# Altium PCB Sinewave_PWM_controller_3_PHASE.PcbDoc
Units mm, origin at the board's own origin, x right, y up, seen from the top; angles counter-clockwise.
Board outline 420 x 300 mm, 2 copper layers (Top Layer, Bottom Layer), stack 2.071 mm thick; 169 components, 93 nets, 494 pads, 0 vias.
Unrouted connection lines stored in the file: 347.
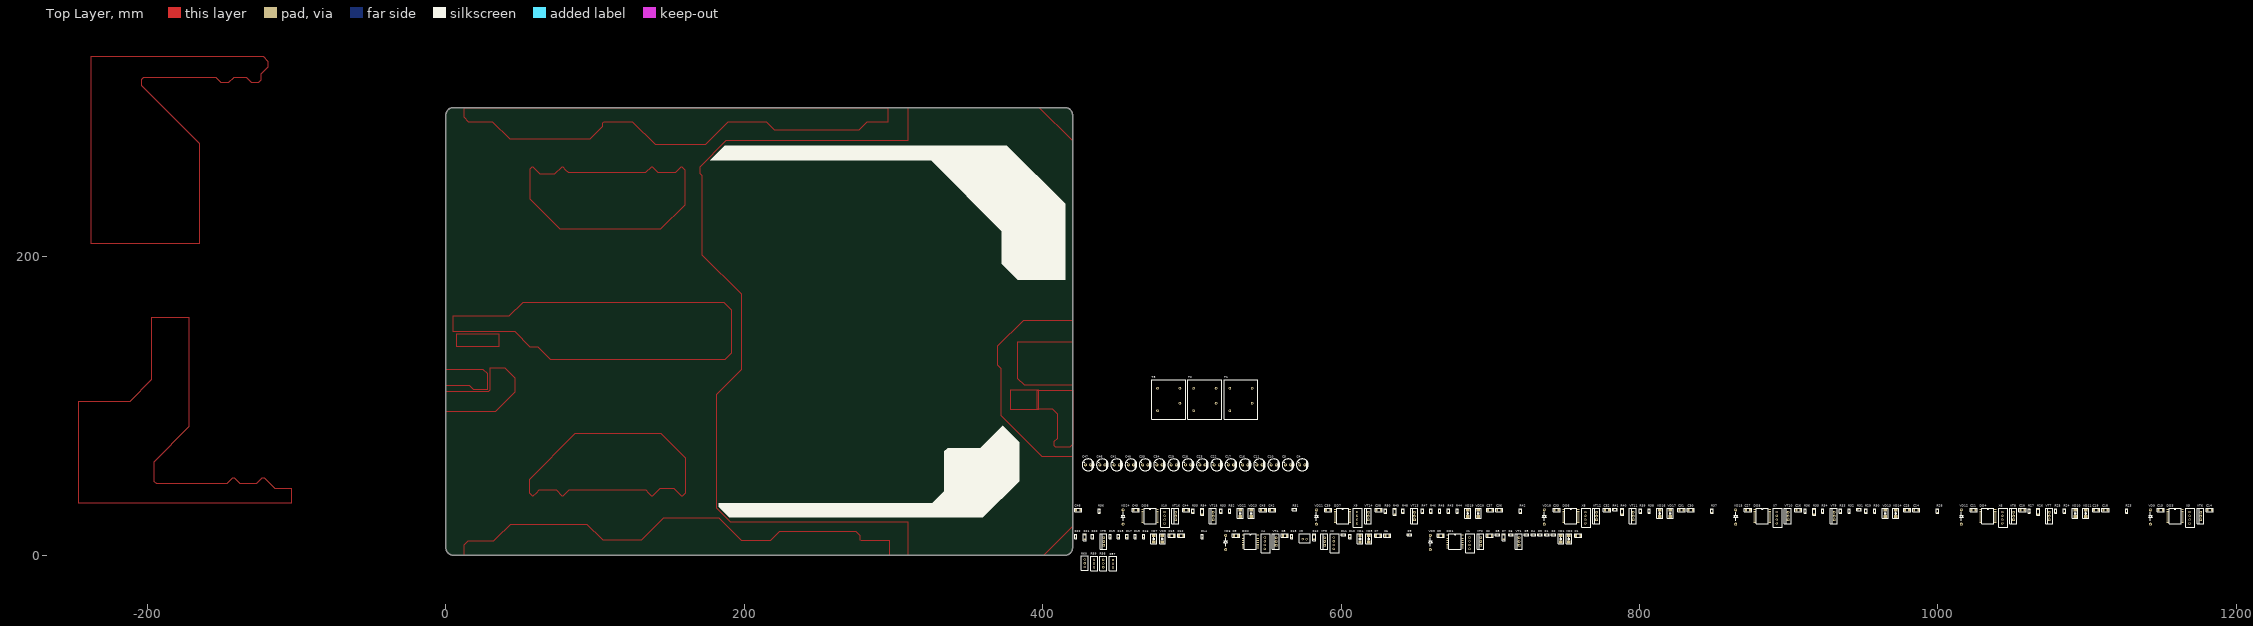
[diagram p0: Top Layer view]
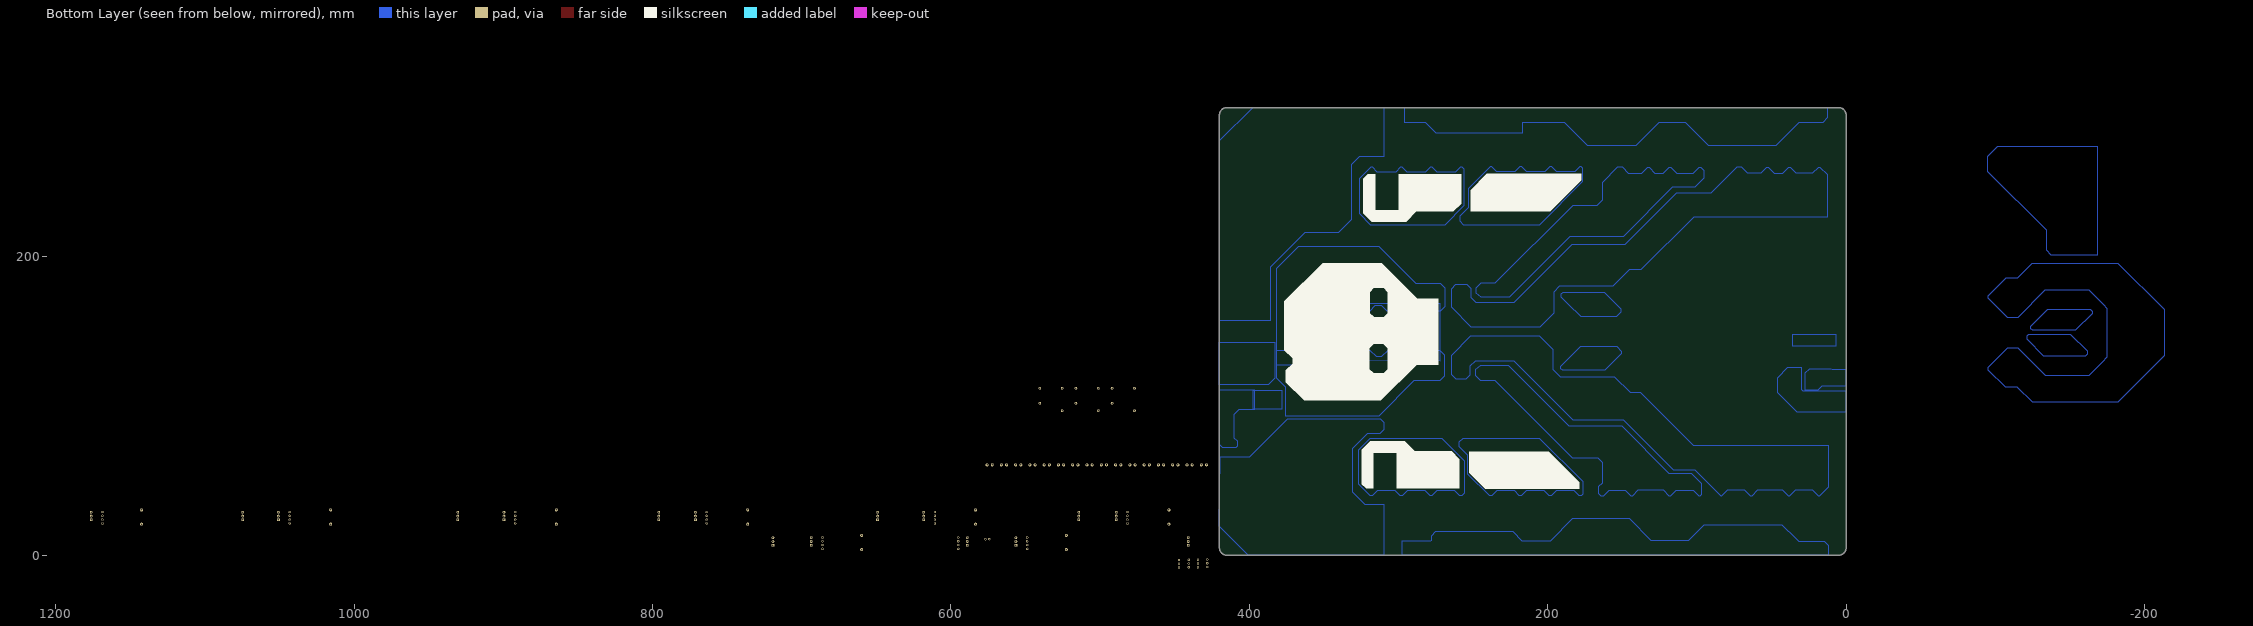
[diagram p1: Bottom Layer view, seen from below]

## Layer stack, top to bottom
Top Solder: solder mask 0.0102, Solder Resist, Dk 3.5
Top Layer: signal copper 0.0356
Dielectric 1: dielectric 2, FR-4, Dk 4.8
Bottom Layer: signal copper 0.0356
Bottom Solder: solder mask 0.0102, Solder Resist, Dk 3.5

## Board outline
5,0 cw(c5,5) 0,5 0,295 cw(c5,295) 5,300 5.077,300 415,300.003 415,300 cw(c415,295) 420,295 420,5 cw(c415,5) 415,0

## Design rules (kind name [scope] priority, off if disabled: settings)
Clearance [All] p1: gap=0.8 ignorepadtopadclearanceinfootprint=TRUE except(0: Via-Hole Fill-Hole Text-Hole; 0.2: Arc-Track Arc-SMDPad Arc-THPad Arc-Via Arc-Fill Arc-Poly Arc-Region Arc-Text Arc-Hole; 0.25: Track-Track Track-SMDPad Track-THPad Track-Via Track-Fill Track-Poly Track-Region Track-Text Track-Hole; 0.254: Via-Via Via-Fill Via-Poly Via-Region Via-Text Fill-Fill Fill-Poly Fill-Region Fill-Text Text-Text; 0.4: Arc-Arc SMDPad-SMDPad SMDPad-THPad SMDPad-Via SMDPad-Fill SMDPad-Poly SMDPad-Region SMDPad-Text SMDPad-Hole)
ComponentClearance [All] p1: gap=-5 collisioncheckmode=3 verticalgap=0.254 showdistances=FALSE
DiffPairsRouting [All] p1: maxlimit=5 minlimit=0.254 mostfreqgap=0.254 toplayer_minwidth=0.381 toplayer_maxwidth=0.381 toplayer_prefwidth=0.381 bottomlayer_minwidth=0.381 bottomlayer_maxwidth=0.381 bottomlayer_prefwidth=0.381 maxuncoupledlength=12.7
Height [All] p1: minheight=0 maxheight=150 prefheight=50
MinimumSolderMaskSliver [All] p1: minsoldermaskwidth=0.15
PlaneClearance [All] p1: clearance=0.7
PlaneConnect [All] p1: planeconnectstyle=Direct reliefexpansion=0.508 reliefentries=4 reliefconductorwidth=0.254 reliefairgap=0.5
PolygonConnect [All] p1: connectstyle=Relief reliefconductorwidth=0.2 reliefentries=4 polygonreliefangle="90 Angle" airgapwidth=0.2
RoutingVias [All] p1: holewidth=0.711 width=1.27 viastyle="Through Hole" minholewidth=0.711 minwidth=1.27 maxholewidth=0.711 maxwidth=1.27
SilkToSilkClearance [All] p1: silktosilkclearance=0.15
SilkToSolderMaskClearance [IsPad] p1: minsilkscreentomaskgap=0.15 clearancetoexposedcopper=TRUE
SolderMaskExpansion [All] p1: expansion=0.102 istentingtop=FALSE
Width [All] p1: maxlimit=7 minlimit=0.254 preferedwidth=2 minimp=50.000000 maximp=50.000000 favimp=50.000000
22 further rules are at their usual default settings.

## Components (designator, comment, footprint, x,y, rotation, side; value= is the part's Value field where it differs from the comment)
C1 "100nF" CAP-1206 758.966,13.213 r0 top
C2 "10nF" CAP-1206 699.538,13.213 r0 top
C3 "100nF" CAP-1206 666.787,13.213 r0 top
C4 "CAP-POLAR" CAPPOL8x12 574.032,60.538 r0 top
C5 "CAP-POLAR" CAPPOL8x12 564.456,60.538 r0 top
C6 "100nF" CAP-1206 631.06,13.213 r0 top
C7 "100nF" CAP-1206 624.835,13.213 r0 top
C8 "10nF" CAP-1206 562.357,13.213 r0 top
C9 "100nF" CAP-1206 529.58,13.213 r0 top
C10 "CAP-POLAR" CAPPOL8x12 554.881,60.538 r0 top
C11 "CAP-POLAR" CAPPOL8x12 545.305,60.538 r0 top
C12 "100nF" CAP-1206 492.778,13.213 r0 top
C13 "100nF" CAP-1206 486.553,13.213 r0 top
C14 "10nF" CAP-1206 1182.162,30.264 r0 top
C15 "100nF" CAP-1206 1149.385,30.264 r0 top
C16 "CAP-POLAR" CAPPOL8x12 535.73,60.538 r0 top
C17 "CAP-POLAR" CAPPOL8x12 526.155,60.538 r0 top
C18 "100nF" CAP-1206 1112.333,30.264 r0 top
C19 "100nF" CAP-1206 1106.108,30.264 r0 top
C20 "10nF" CAP-1206 1056.681,30.264 r0 top
C21 "100nF" CAP-1206 1023.904,30.264 r0 top
C22 "CAP-POLAR" CAPPOL8x12 516.604,60.538 r0 top
C23 "CAP-POLAR" CAPPOL8x12 507.029,60.538 r0 top
C24 "100nF" CAP-1206 985.577,30.264 r0 top
C25 "100nF" CAP-1206 979.352,30.264 r0 top
C26 "10nF" CAP-1206 906.523,30.264 r0 top
C27 "100nF" CAP-1206 872.722,30.264 r0 top
C28 "CAP-POLAR" CAPPOL8x12 497.453,60.538 r0 top
C29 "CAP-POLAR" CAPPOL8x12 487.878,60.538 r0 top
C30 "100nF" CAP-1206 834.395,30.264 r0 top
C31 "100nF" CAP-1206 828.17,30.264 r0 top
C32 "10nF" CAP-1206 778.217,30.264 r0 top
C33 "100nF" CAP-1206 744.415,30.264 r0 top
C34 "CAP-POLAR" CAPPOL8x12 478.302,60.538 r0 top
C35 "CAP-POLAR" CAPPOL8x12 468.727,60.538 r0 top
C36 "100nF" CAP-1206 706.064,30.264 r0 top
C37 "100nF" CAP-1206 699.863,30.264 r0 top
C38 "10nF" CAP-1206 625.235,30.264 r0 top
C39 "100nF" CAP-1206 591.408,30.264 r0 top
C40 "CAP-POLAR" CAPPOL8x12 459.151,60.538 r0 top
C41 "CAP-POLAR" CAPPOL8x12 449.576,60.538 r0 top
C42 "100nF" CAP-1206 553.856,30.264 r0 top
C43 "100nF" CAP-1206 547.631,30.264 r0 top
C44 "10nF" CAP-1206 496.153,30.264 r0 top
C45 "100nF" CAP-1206 462.352,30.264 r0 top
C46 "CAP-POLAR" CAPPOL8x12 440,60.538 r0 top
C47 "CAP-POLAR" CAPPOL8x12 430.425,60.538 r0 top
C48 "100nF" CAP-1206 423.75,30.264 r0 top
DD1 "HCPL-316J" SO16_W 676.362,9.838 r0 top
DD2 "HCPL-316J" SO16_W 539.18,9.838 r0 top
DD3 "HCPL-316J" SO16_W 1158.986,26.889 r0 top
DD4 "HCPL-316J" SO16_W 1033.505,26.889 r0 top
DD5 "HCPL-316J" SO16_W 882.322,26.889 r0 top
DD6 "HCPL-316J" SO16_W 754.016,26.889 r0 top
DD7 "HCPL-316J" SO16_W 601.008,26.889 r0 top
DD8 "HCPL-316J" SO16_W 471.952,26.889 r0 top
R1 "220" RES-0805 737.915,13.663 r0 top
R2 "100" RES-0805 742.415,13.663 r0 top
R3 "1K" RES-0805 733.39,13.663 r0 top
R4 "5K1" RES-0805 728.865,13.663 r0 top
R5 "220" RES-0805 724.339,13.663 r0 top
R6 "1K" RES-0805 713.764,13.663 r0 top
R7 "10" RES-1206 708.914,12.138 r90 top
R8 "10K" RES-0805 704.914,13.663 r0 top
R9 "1K" RES-0805 645.986,13.663 r0 top
R10 "100" RES-0805 605.934,12.688 r90 top
R11 "5K1" RES-0805 601.583,13.663 r0 top
R12 "10" RES-1206 581.908,12.138 r90 top
R13 "10K" RES-0805 566.957,12.688 r90 top
R14 "1K" RES-0805 506.954,12.688 r90 top
R15 "220" RES-0805 462.052,12.688 r90 top
R16 "100" RES-0805 467.652,12.688 r90 top
R17 "1K" RES-0805 456.451,12.688 r90 top
R18 "5K1" RES-0805 450.851,12.688 r90 top
R19 "220" RES-0805 445.276,12.688 r90 top
R20 "1K" RES-0805 433.35,12.538 r90 top
R21 "10" RES-1206 428.25,12.138 r90 top
R22 "10K" RES-0805 422.15,12.538 r90 top
R23 "1K" RES-0805 1126.509,29.589 r90 top
R24 "100" RES-0805 1084.907,29.589 r90 top
R25 "5K1" RES-0805 1079.057,29.589 r90 top
R26 "10" RES-1206 1067.381,29.189 r90 top
R27 "10K" RES-0805 1061.281,29.589 r90 top
R28 "1K" RES-0805 999.753,29.589 r90 top
R29 "220" RES-0805 951.801,29.589 r90 top
R30 "100" RES-0805 957.651,29.589 r90 top
R31 "1K" RES-0805 947.225,30.714 r0 top
R32 "5K1" RES-0805 940.6,29.589 r90 top
R33 "220" RES-0805 934.75,29.589 r90 top
R34 "1K" RES-0805 922.824,29.589 r90 top
R35 "10" RES-1206 917.249,29.189 r90 top
R36 "10K" RES-0805 911.124,29.589 r90 top
R37 "1K" RES-0805 848.571,29.589 r90 top
R38 "100" RES-0805 806.468,29.589 r90 top
R39 "5K1" RES-0805 800.618,29.589 r90 top
R40 "10" RES-1206 788.418,29.189 r90 top
R41 "10K" RES-0805 783.592,30.714 r0 top
R42 "1K" RES-0805 720.264,29.589 r90 top
R43 "220" RES-0805 672.062,29.589 r90 top
R44 "100" RES-0805 677.912,29.589 r90 top
R45 "1K" RES-0805 666.187,29.589 r90 top
R46 "5K1" RES-0805 660.336,29.589 r90 top
R47 "220" RES-0805 654.486,29.589 r90 top
R48 "1K" RES-0805 641.535,29.589 r90 top
R49 "10" RES-1206 635.935,29.189 r90 top
R50 "10K" RES-0805 629.835,29.589 r90 top
R51 "1K" RES-0805 568.782,30.714 r0 top
R52 "100" RES-0805 525.43,29.589 r90 top
R53 "5K1" RES-0805 519.579,29.589 r90 top
R54 "10" RES-1206 506.854,29.189 r90 top
R55 "10K" RES-0805 500.754,29.589 r90 top
R56 "1K" RES-0805 437.95,29.589 r90 top
R57 "3296" 3296W 445.1,-5.4 r0 top
R58 "3296" 3296W 438.55,-5.3 r0 top
R59 "3296" 3296W 432.45,-5.3 r0 top
R60 "3296" 3296W 426.15,-5.1 r0 top
T1 "TRANS_220_12" TRANS_220_12 532.928,104.363 r0 top
T2 "TRANS_220_12" TRANS_220_12 508.701,104.363 r0 top
T3 "TRANS_220_12" TRANS_220_12 484.475,104.363 r0 top
VD1 "US1M" DO-214BA 747.341,11.088 r90 top
VD2 "US1M" DO-214BA 752.691,11.088 r90 top
VD3 "1N4737" DO-41 659.811,8.263 r90 top
VD4 "US1M" DO-214BA 612.684,11.088 r90 top
VD5 "US1M" DO-214BA 618.534,11.088 r90 top
VD6 "1N4737" DO-41 522.63,8.263 r90 top
VD7 "US1M" DO-214BA 474.427,11.088 r90 top
VD8 "US1M" DO-214BA 480.253,11.088 r90 top
VD9 "1N4737" DO-41 1142.435,25.314 r90 top
VD10 "US1M" DO-214BA 1091.932,28.114 r90 top
VD11 "US1M" DO-214BA 1099.033,28.114 r90 top
VD12 "1N4737" DO-41 1015.679,25.314 r90 top
VD13 "US1M" DO-214BA 964.676,28.114 r90 top
VD14 "US1M" DO-214BA 971.802,28.114 r90 top
VD15 "1N4737" DO-41 864.496,25.314 r90 top
VD16 "US1M" DO-214BA 813.494,28.114 r90 top
VD17 "US1M" DO-214BA 820.594,28.114 r90 top
VD18 "1N4737" DO-41 736.165,25.314 r90 top
VD19 "US1M" DO-214BA 684.913,28.114 r90 top
VD20 "US1M" DO-214BA 692.038,28.114 r90 top
VD21 "1N4737" DO-41 583.433,25.314 r90 top
VD22 "US1M" DO-214BA 532.43,28.114 r90 top
VD23 "US1M" DO-214BA 539.805,28.114 r90 top
VD24 "1N4737" DO-41 453.851,25.314 r90 top
VT1 "D44H11G" TO-220-3 719.264,9.213 r90 top
VT2 "D45H11G" TO-220-3 693.588,9.213 r90 top
VT3 "D44H11G" TO-220-3 589.008,9.213 r90 top
VT4 "D45H11G" TO-220-3 556.406,9.213 r90 top
VT5 "D44H11G" TO-220-3 440.926,9.213 r90 top
VT6 "D45H11G" TO-220-3 1176.212,26.264 r90 top
VT7 "D44H11G" TO-220-3 1074.732,26.264 r90 top
VT8 "D45H11G" TO-220-3 1050.73,26.264 r90 top
VT9 "D44H11G" TO-220-3 930.425,26.264 r90 top
VT10 "D45H11G" TO-220-3 899.548,26.264 r90 top
VT11 "D44H11G" TO-220-3 795.768,26.264 r90 top
VT12 "D45H11G" TO-220-3 771.217,26.264 r90 top
VT13 "D44H11G" TO-220-3 649.136,26.264 r90 top
VT14 "D45H11G" TO-220-3 618.234,26.264 r90 top
VT15 "D44H11G" TO-220-3 514.204,26.264 r90 top
VT16 "D45H11G" TO-220-3 489.153,26.264 r90 top
X1 "CONN-4-PIN" CONN-PLS-4-2.54mm_1 686.063,4.263 r90 top
X2 "CONN-4-PIN" CONN-PLS-4-2.54mm_1 595.058,4.263 r90 top
X3 "CONN-2-PIN" XH2- 574.307,10.763 r0 top
X4 "CONN-4-PIN" CONN-PLS-4-2.54mm_1 548.881,4.263 r90 top
X5 "CONN-4-PIN" CONN-PLS-4-2.54mm_1 1168.686,21.314 r90 top
X6 "CONN-4-PIN" CONN-PLS-4-2.54mm_1 1043.205,21.314 r90 top
X7 "CONN-4-PIN" CONN-PLS-4-2.54mm_1 892.023,21.314 r90 top
X8 "CONN-4-PIN" CONN-PLS-4-2.54mm_1 763.716,21.314 r90 top
X9 "CONN-4-PIN" CONN-PLS-4-2.54mm_1 610.709,21.314 r90 top
X10 "CONN-4-PIN" CONN-PLS-4-2.54mm_1 481.653,21.314 r90 top

## Footprints (in the part's own frame and the unit in brackets; to place one, negate y for a bottom-side part, rotate by r counter-clockwise, add the part's x,y. Pads: shape width x height; smd on the part's side, far side on the other; paste and mask are expansions set on the pad)
3296W [mm]
  round 1.5 hole 0.8: 1(2,-2.8) 2(2,-0.3) 3(2,2.2)
  silkscreen extent -0.4,-5.1 4.5,4.6, body extent -0.43,-5.02 4.4,4.52, height 11.55
CAP-1206 [mm]
  rect 1.3x1.8 smd: 1(-1.425,0) 2(1.425,0)
  silkscreen extent -2.37,-1.2 2.37,1.2, body extent -1.68,-0.87 1.67,0.87, height 0.95
CAPPOL8x12 [mm]
  round 2 hole 1: 1(-1.75,0) 2(1.75,0)
  silkscreen extent -4,-4 4,4, body extent -4,-4 4.01,4, height 13.51
CONN-PLS-4-2.54mm_1 [mm]
  round 1.5 hole 0.9: 1(0,0) 2(2.54,0) 3(5.08,0) 4(7.62,0)
  silkscreen extent -2.6,-3.55 10.15,2.47, body extent -2.45,-3.4 9.95,2.35, height 7
DO-41 [mm]
  round 2 hole 1: 1(5,0) 2(-4.5,0)
  silkscreen extent -2.2,-1.3 3.6,1.2, body extent -4.93,-1.36 5.45,1.34, height 2.83
DO-214BA [mm]
  rect 2x2.3 smd: 1(-2.15,0) 2(2.15,0)
  silkscreen extent -3.35,-1.92 3.35,1.92, body extent -2.7,-1.81 2.7,1.81, height 3.3
RES-0805 [mm]
  rect 0.8x1.25 smd mask+0.015: 1(-1,0) 2(1,0)
  silkscreen extent -1.52,-0.76 1.52,0.76, body extent -1,-0.62 1,0.63, height 0.6
RES-1206 [mm]
  rect 1x1.6 smd: 1(-1.6,0) 2(1.6,0)
  silkscreen extent -2.29,-1.02 2.29,1.02, body extent -1.6,-0.8 1.6,0.8, height 0.6
SO16_W [mm]
  rect 1.5x0.6 smd: 1(-5,3.81) 2(-5,2.54) 3(-5,1.27) 4(-5,0) 5(-5,-1.27) 6(-5,-2.54) 7(-5,-3.81) 8(-5,-5.08) 9(5,-5.08) 10(5,-3.81) 11(5,-2.54) 12(5,-1.27) 13(5,0) 14(5,1.27) 15(5,2.54) 16(5,3.81)
  silkscreen extent -4.05,-5.85 4.05,4.57, body extent -5.16,-5.8 5.16,4.53, height 2.48
TO-220-3 [mm]
  rect 1.8x1.8 hole 1: 1(-2.54,0)
  round 1.8 hole 1: 2(0,0) 3(2.54,0)
  silkscreen extent -5.2,-2.1 5.2,2.5, body extent -4.95,-2.1 4.95,2.4, height 23.8
TRANS_220_12 [mm]
  round 1.8 hole 1: 1(-7.5,7.5) 2(-7.5,-7.5) 3(7.5,-2.5) 4(7.5,7.5)
  silkscreen extent -11.4,-13.3 11.3,13.3, body extent -11.26,-13.25 11.25,13.25, height 23.7
XH2- [mm]
  round 1.5 hole 0.9: 1(0,0) 2(2.54,0)
  silkscreen extent -2.5,-2.35 5.13,3.65, body extent -2.4,-2.25 5,3.55, height 7

## Part data
C1 C2 C3 C6 C7 C8 C9 C12 C13 C14 C15 C18 C19 C20 C21 C24 C25 C26 C27 C30 C31 C32 C33 C36 C37 C38 C39 C42 C43 C44 C45 C48: library part CAP-NON-POLAR
R1 R2 R3 R4 R5 R6 R7 R8 R9 R10 R11 R12 R13 R14 R15 R16 R17 R18 R19 R20 R21 R22 R23 R24 R25 R26 R27 R28 R29 R30 R31 R32 R33 R34 R35 R36 R37 R38 R39 R40 R41 R42 R43 R44 R45 R46 R47 R48 R49 R50 R51 R52 R53 R54 R55 R56: library part RES-CONST
VD1 VD2 VD4 VD5 VD7 VD8 VD10 VD11 VD13 VD14 VD16 VD17 VD19 VD20 VD22 VD23: library part DIODE
VD3 VD6 VD9 VD12 VD15 VD18 VD21 VD24: library part ZENER
VT1 VT3 VT5 VT7 VT9 VT11 VT13 VT15: library part BIPOLAR-NPN-BEC
VT2 VT4 VT6 VT8 VT10 VT12 VT14 VT16: library part BIPOLAR-PNP-BCE

## Nets (pads, with @x,y where several pads share a name; then routed paths per layer and width w, separated by ;. In a path a pad name is that pad's centre, name@x,y a point inside that pad or via, vN(x,y) a via of type N, cw(c..) or ccw(c..) an arc to the next point about the centre after c; other vN are vias at no path point)
24V1: C9.2 C10.1 C21.2 C22.1 C33.2 C34.1 C45.2 C46.1 DD2.12 DD2.13 DD4.12 DD4.13 DD6.12 DD6.13 DD8.12 DD8.13 R11.1 R25.1 R39.1 R53.1 VD6.1 VD12.1 VD18.1 VD24.1 VT3.2 VT7.2 VT11.2 VT15.2
24V2: C3.2 C4.1 DD1.12 DD1.13 R4.1 VD3.1 VT1.2
24V3: C15.2 C16.1 DD3.12 DD3.13 R18.1 VD9.1 VT5.2
24V4: C27.2 C28.1 DD5.12 DD5.13 R32.1 VD15.1 VT9.2
24V5: C39.2 C40.1 DD7.12 DD7.13 R46.1 VD21.1 VT13.2
+5V: DD1.3 DD1.5 DD2.3 DD2.5 DD3.3 DD3.5 DD4.3 DD4.5 DD5.3 DD5.5 DD6.3 DD6.5 DD7.3 DD7.5 DD8.3 DD8.5
A1: R1.2
A2: R5.2
B1: R15.2
B2: R19.2
C1: R29.2
C2: R33.2
FAULT: DD1.6 DD2.6 DD3.6 DD4.6 DD5.6 DD6.6 DD7.6 DD8.6
G1: R43.2
G2: R47.2
GND: DD1.4 DD1.8 DD2.4 DD2.8 DD3.4 DD3.8 DD4.4 DD4.8 DD5.4 DD5.8 DD6.4 DD6.8 DD7.4 DD7.8 DD8.4 DD8.8 R3.2 R6.2 R17.2 R20.2 R31.2 R34.2 R45.2 R48.2
NetC1_1: C1.1 DD1.14 R2.1
NetC1_2: C1.2 C3.1 C4.2 C5.1 C6.1 DD1.16 R9.2 VD3.2 X1.4
NetC2_1: C2.1 R7.2 R8.2 VT1.1 VT2.1
NetC7_1: C7.1 DD2.14 R10.1
NetC7_2: C7.2 C9.1 C10.2 C11.1 C12.1 DD2.16 R14.2 VD6.2 X4.3
NetC8_1: C8.1 R12.2 R13.2 VT3.1 VT4.1
NetC13_1: C13.1 DD3.14 R16.1
NetC13_2: C13.2 C15.1 C16.2 C17.1 C18.1 DD3.16 R23.2 VD9.2 X5.4
NetC14_1: C14.1 R21.2 R22.2 VT5.1 VT6.1
NetC19_1: C19.1 DD4.14 R24.1
NetC19_2: C19.2 C21.1 C22.2 C23.1 C24.1 DD4.16 R28.2 VD12.2 X6.3
NetC20_1: C20.1 R26.2 R27.2 VT7.1 VT8.1
NetC25_1: C25.1 DD5.14 R30.1
NetC25_2: C25.2 C27.1 C28.2 C29.1 C30.1 DD5.16 R37.2 VD15.2 X7.4
NetC26_1: C26.1 R35.2 R36.2 VT9.1 VT10.1
NetC31_1: C31.1 DD6.14 R38.1
NetC31_2: C31.2 C33.1 C34.2 C35.1 C36.1 DD6.16 R42.2 VD18.2 X8.3
NetC32_1: C32.1 R40.2 R41.2 VT11.1 VT12.1
NetC37_1: C37.1 DD7.14 R44.1
NetC37_2: C37.2 C39.1 C40.2 C41.1 C42.1 DD7.16 R51.2 VD21.2 X9.4
NetC38_1: C38.1 R49.2 R50.2 VT13.1 VT14.1
NetC43_1: C43.1 DD8.14 R52.1
NetC43_2: C43.2 C45.1 C46.2 C47.1 C48.1 DD8.16 R56.2 VD24.2 X10.3
NetC44_1: C44.1 R54.2 R55.2 VT15.1 VT16.1
NetDD1_1: DD1.1 DD2.2 R1.1 R3.1
NetDD1_2: DD1.2 DD2.1 R5.1 R6.1
NetDD1_11: DD1.11 R7.1
NetDD2_11: DD2.11 R12.1
NetDD3_1: DD3.1 DD4.2 R15.1 R17.1
NetDD3_2: DD3.2 DD4.1 R19.1 R20.1
NetDD3_11: DD3.11 R21.1
NetDD4_11: DD4.11 R26.1
NetDD5_1: DD5.1 DD6.2 R29.1 R31.1
NetDD5_2: DD5.2 DD6.1 R33.1 R34.1
NetDD5_11: DD5.11 R35.1
NetDD6_11: DD6.11 R40.1
NetDD7_1: DD7.1 DD8.2 R43.1 R45.1
NetDD7_2: DD7.2 DD8.1 R47.1 R48.1
NetDD7_11: DD7.11 R49.1
NetDD8_11: DD8.11 R54.1
NetR2_2: R2.2 R4.2 VD1.2
NetR10_2: R10.2 R11.2 VD4.2
NetR16_2: R16.2 R18.2 VD7.2
NetR24_2: R24.2 R25.2 VD10.2
NetR30_2: R30.2 R32.2 VD13.2
NetR38_2: R38.2 R39.2 VD16.2
NetR44_2: R44.2 R46.2 VD19.2
NetR52_2: R52.2 R53.2 VD22.2
NetVD1_1: VD1.1 VD2.2
NetVD2_1: VD2.1 X1.1
NetVD4_1: VD4.1 VD5.2
NetVD5_1: VD5.1 X4.1
NetVD7_1: VD7.1 VD8.2
NetVD8_1: VD8.1 X5.1
NetVD10_1: VD10.1 VD11.2
NetVD11_1: VD11.1 X6.1
NetVD13_1: VD13.1 VD14.2
NetVD14_1: VD14.1 X7.1
NetVD16_1: VD16.1 VD17.2
NetVD17_1: VD17.1 X8.1
NetVD19_1: VD19.1 VD20.2
NetVD20_1: VD20.1 X9.1
NetVD22_1: VD22.1 VD23.2
NetVD23_1: VD23.1 X10.1
NetVT1_3: VT1.3 VT2.3 X1.3
NetVT3_3: VT3.3 VT4.3 X4.4
NetVT5_3: VT5.3 VT6.3 X5.3
NetVT7_3: VT7.3 VT8.3 X6.4
NetVT9_3: VT9.3 VT10.3 X7.3
NetVT11_3: VT11.3 VT12.3 X8.4
NetVT13_3: VT13.3 VT14.3 X9.3
NetVT15_3: VT15.3 VT16.3 X10.4
VEE_1: C8.2 C11.2 C12.2 C20.2 C23.2 C24.2 C32.2 C35.2 C36.2 C44.2 C47.2 C48.2 DD2.9 DD2.10 DD4.9 DD4.10 DD6.9 DD6.10 DD8.9 DD8.10 R13.1 R14.1 R27.1 R28.1 R41.1 R42.1 R55.1 R56.1 VT4.2 VT8.2 VT12.2 VT16.2
VEE_2: C2.2 C5.2 C6.2 DD1.9 DD1.10 R8.1 R9.1 VT2.2
VEE_3: C14.2 C17.2 C18.2 DD3.9 DD3.10 R22.1 R23.1 VT6.2
VEE_4: C26.2 C29.2 C30.2 DD5.9 DD5.10 R36.1 R37.1 VT10.2
VEE_5: C38.2 C41.2 C42.2 DD7.9 DD7.10 R50.1 R51.1 VT14.2
pads on no net: DD1.7 DD1.15 DD2.7 DD2.15 DD3.7 DD3.15 DD4.7 DD4.15 DD5.7 DD5.15 DD6.7 DD6.15 DD7.7 DD7.15 DD8.7 DD8.15 R57.1 R57.2 R57.3 R58.1 R58.2 R58.3 R59.1 R59.2 R59.3 R60.1 R60.2 R60.3 T1.1 T1.2 T1.3 T1.4 T2.1 T2.2 T2.3 T2.4 T3.1 T3.2 T3.3 T3.4 X1.2 X2.1 X2.2 X2.3 X2.4 X3.1 X3.2 X4.2 X5.2 X6.2 X7.2 X8.2 X9.2 X10.2

## Polygon pours and split planes (outlines as drawn)
no net on Bottom Layer "NONET_L-01_P-001" (solid, shelved, pour order 18): -161.891,134.947 -161.891,136.6 -150.617,147.875 -122.127,147.875 -120.951,146.699 -120.951,145.004 -132.231,133.725 -160.669,133.725
no net on Bottom Layer "NONET_L-01_P-001" (solid, shelved, pour order 16): 150.687,136.742 150.687,135.088 161.887,123.888 189.965,123.888 191.15,125.073 191.15,126.7 186.487,131.363 177.925,139.925 153.87,139.925
no net on Bottom Layer "NONET_L-01_P-001" (solid, shelved, pour order 14): -108.412,159.059 -95.265,172.206 -95.265,173.954 -107.186,185.874 -114.906,185.874 -124.766,195.734 -182.091,195.734 -213.09,164.735 -213.09,133.558 -181.916,102.384 -125.041,102.384 -114.866,112.559 -106.891,112.559 -95.316,124.134 -95.316,125.813 -108.487,138.984 -115.041,138.984 -133.391,120.634 -162.891,120.634 -171.891,129.634 -175.191,132.934 -175.191,165.259 -172.6,167.85 -162.991,177.459 -133.316,177.459 -114.916,159.059
GND on Bottom Layer "NONET_L-01_P-001" (solid, shelved, pour order 41): 11.975,6.687 11.975,0.112 297.6,0.112 297.6,9.813 278.225,9.813 277.875,10.163 277.875,12.988 274.963,15.9 223.488,15.9 217.4,9.813 198.112,9.813 183.175,24.75 145.475,24.75 130.888,10.163 105.3,10.163 104.775,10.688 94.913,20.55 43.075,20.55 33.725,11.2 31.875,9.35 14.637,9.35
GND on Bottom Layer "NONET_L-01_P-001" (solid, shelved, pour order 26): 12.125,293.425 12.125,300 296.05,300 296.05,290.3 282.1,290.3 275.075,283.275 216.825,283.275 216.825,290.3 188.95,290.3 173.575,274.925 140.6,274.925 125.225,290.3 107.9,290.3 104.925,287.325 92.525,274.925 46.925,274.925 31.55,290.3 15.25,290.3
no net on Bottom Layer "NONET_L-01_P-001" (solid, shelved, pour order 60): -168.475,201.088 -168.463,201.1 -137.6,201.1 -134.4,204.3 -134.4,217.65 -94.975,257.075 -94.975,267.425 -95.025,267.425 -101.7,274.1 -168.475,274.1
GND on Bottom Layer "NONET_L-01_P-001" (solid, shelved, pour order 33): 46.2,118.748 46.2,109.2 33.2,96.2 0,96.2 0,109.855 28.68,109.855 29.825,111 29.825,125.575 39.373,125.575
no net on Bottom Layer "NONET_L-01_P-001" (solid, shelved, pour order 52): 268.875,177.55 268.875,166.65 271.95,163.575 307.675,163.575 311.15,167.05 315.75,167.05 319.225,163.575 344.05,163.575 347.525,167.05 351.75,167.05 353.15,165.65 353.15,127.475 381.725,127.475 381.725,192.325 366.925,207.125 313.175,207.125 288.475,182.425 272.1,182.425 268.906,179.231
no net on Bottom Layer "NONET_L-01_P-001" (solid, shelved, pour order 59): 272.875,221.55 268.775,221.55 255.8,234.525 255.8,258.55 257.35,260.1 258.65,260.1 261.925,256.825 274.075,256.825 277.35,260.1 278.675,260.1 281.95,256.825 294.075,256.825 297.35,260.1 298.675,260.1 301.95,256.825 314.075,256.825 317.35,260.1 318.65,260.1 326.425,252.325 326.425,229.125 318.85,221.55
no net on Bottom Layer "NONET_L-01_P-001" (solid, shelved, pour order 8): 12.675,226.65 102.05,226.65 137.525,191.175 145.4,191.175 156.225,180.35 192.125,180.35 196.075,176.4 196.075,162.325 205.475,152.925 251.25,152.925 264.45,166.125 264.45,178.632 261.494,181.588 254.283,181.588 251.55,178.854 251.55,173.025 248.125,169.6 222.475,169.6 183.675,208.4 147.95,208.4 113.575,242.775 90.45,242.775 77.913,255.313 73.013,260.213 70.188,260.213 66.163,256.188 56.938,256.187 53.013,260.112 52.088,260.112 48.088,256.113 42.487,256.113 40.463,258.137 38.487,260.113 37.538,260.113 33.613,256.188 22.413,256.188 18.487,260.113 17.538,260.113 12.675,255.25
no net on Bottom Layer "NONET_L-01_P-001" (solid, shelved, pour order 47): 273.075,78.425 271.075,78.425 256,63.35 256,41.425 257.55,39.875 258.85,39.875 262.125,43.15 274.275,43.15 277.55,39.875 278.875,39.875 282.15,43.15 294.275,43.15 297.55,39.875 298.875,39.875 302.15,43.15 314.275,43.15 317.55,39.875 318.85,39.875 326.625,47.65 326.625,70.85 319.05,78.425
no net on Bottom Layer "NONET_L-01_P-001" (solid, shelved, pour order 40): 11.575,73.25 102.25,73.25 137.725,108.725 144.375,108.725 155.094,119.444 191.294,119.444 196.318,124.468 196.318,137.593 205.325,146.6 251.825,146.6 264.65,133.775 264.65,121.268 261.694,118.312 254.483,118.312 251.75,121.046 251.75,126.875 248.325,130.3 222.675,130.3 183.15,90.775 149.5,90.775 115.85,57.125 101.35,57.125 84.125,39.9 83.175,39.9 79.363,43.712 68.137,43.712 64.325,39.9 62.975,39.9 59.087,43.787 42.688,43.788 40.663,41.763 38.688,39.788 37.738,39.788 33.813,43.713 22.613,43.713 18.688,39.788 17.738,39.788 11.575,45.95
GND on Bottom Layer "NONET_L-01_P-001" (solid, shelved, pour order 56): 420,157.475 385.775,157.475 385.775,193.2 362.5,216.475 340.1,216.475 331.4,225.175 331.387,262.107 326.019,267.475 309.625,267.475 309.625,300 331.387,300 397.672,300 420,277.672
GND on Bottom Layer "NONET_L-01_P-001" (solid, shelved, pour order 57): 419.625,66.05 399.65,66.05 374.2,91.5 312.275,91.5 309.875,89.1 309.875,84.075 312.45,81.5 320.95,81.5 331.05,71.4 331.05,42.475 322.6,34.025 309.875,34.025 309.875,0 400.65,0 420.025,19.375
no net on Bottom Layer "NONET_L-01_P-001" (solid, shelved, pour order 55): 420,142.8 382.998,142.8 382.998,118.502 387.375,114.125 420,114.125
no net on Bottom Layer "NONET_L-01_P-001" (solid, shelved, pour order 54): 271.85,130.413 271.85,168.55 354.55,168.55 354.55,130.615
no net on Bottom Layer "NONET_L-01_P-001" (solid, shelved, pour order 53): 268.895,134.095 271.925,137.125 307.35,137.125 311.55,132.925 314.65,132.925 318.85,137.125 343.775,137.125 347.975,132.925 351.175,132.925 355.375,137.125 381.875,137.125 381.875,118.925 375.825,112.875 375.825,93.575 313,93.575 289.425,117.15 272.025,117.15 268.895,120.28
no net on Bottom Layer "NONET_L-01_P-001" (solid, shelved, pour order 48): 205.563,78.488 176.613,49.537 176.613,40.788 177.575,39.825 178.875,39.825 182.15,43.1 194.3,43.1 197.575,39.825 198.9,39.825 202.175,43.1 214.3,43.1 217.575,39.825 218.9,39.825 222.175,43.1 234.3,43.1 237.575,39.825 238.875,39.825 253.438,54.388 253.437,67.063 259.199,72.824 259.199,76.027 256.738,78.488
no net on Bottom Layer "NONET_L-01_P-001" (solid, shelved, pour order 46): 205.35,221.55 176.4,250.5 176.4,259.25 177.363,260.212 178.663,260.212 181.938,256.937 194.088,256.937 197.362,260.212 198.688,260.212 201.963,256.937 214.088,256.937 217.363,260.212 218.688,260.212 221.963,256.937 234.088,256.937 237.363,260.212 238.662,260.212 253.225,245.65 253.225,232.975 258.986,227.214 258.986,224.011 256.526,221.55
no net on Bottom Layer "NONET_L-01_P-001" (solid, shelved, pour order 39): 96.775,47.937 103.563,54.725 118.363,54.725 149.973,86.335 185.673,86.335 226.198,126.86 245.057,126.86 248.423,124.282 248.423,120.653 245.105,117.335 235.532,117.335 183.407,65.21 166.61,65.21 163.569,62.169 163.581,48.319 165.975,45.925 165.975,41.55 164.325,39.9 162.425,39.9 158.64,43.685 148.01,43.685 144.225,39.9 143.05,39.9 139.19,43.76 122.71,43.76 118.85,39.9 117.625,39.9 113.84,43.685 102.56,43.685 98.775,39.9 97.65,39.9 96.775,40.775
no net on Bottom Layer "NONET_L-01_P-001" (solid, shelved, pour order 35): 27.575,110.845 18.505,110.845 15.925,113.425 0,113.425 0,124.175 9.4,124.175 9.95,124.725 24.8,124.725 27.575,121.95
GND on Bottom Layer "NONET_L-01_P-001" (solid, shelved, pour order 30): 407.645,75.875 407.645,76.245 409.95,78.55 409.95,94.375 406.625,97.7 396.425,97.7 396.425,110.586 420,110.586 420,74.225 418.075,72.3 408.7,72.3 407.645,73.355
GND on Bottom Layer "NONET_L-01_P-001" (solid, shelved, pour order 25): 378.15,110.625 378.15,97.7 397.275,97.7 397.275,110.625
no net on Bottom Layer "NONET_L-01_P-001" (solid, shelved, pour order 20): 7,148 7,139.95 35.6,139.95 35.6,148
no net on Bottom Layer "NONET_L-01_P-001" (solid, shelved, pour order 15): 150.675,163.122 150.675,164.775 161.875,175.975 189.954,175.975 191.138,174.79 191.138,173.163 186.475,168.5 178,160.025 153.772,160.025
NetC1_2 on Bottom Layer "NONET_L-01_P-001" (solid, shelved, pour order 17): -164.825,163.543 -164.825,161.889 -153.551,150.615 -125.061,150.615 -123.885,151.791 -123.885,153.485 -135.165,164.765 -163.604,164.765
no net on Bottom Layer "NONET_L-01_P-001" (solid, shelved, pour order 7): 95.5,252.65 101.575,246.575 116.375,246.575 149.425,213.525 185.125,213.525 225.65,173 244.509,173 247.875,175.578 247.875,179.207 244.557,182.525 234.984,182.525 182.859,234.65 166.8,234.65 163.225,238.225 163.225,249.975 153,260.2 150.175,260.2 146.15,256.175 136.925,256.175 133,260.1 132.075,260.1 128.075,256.1 122.475,256.1 120.45,258.125 118.475,260.1 117.525,260.1 113.6,256.175 102.4,256.175 98.475,260.1 97.525,260.1 95.5,258.075
no net on Top Layer "NONET_L-01_P-001" (solid, shelved, pour order 22): 186.578,169.3 167.025,169.3 139.675,169.3 51.45,169.3 42.25,160.1 4.55,160.1 4.55,149.975 46.15,149.975 56.275,139.85 61.4,139.85 70.05,131.2 138.675,131.2 165.075,131.2 187.25,131.2 191.625,135.575 191.625,164.253
GND on Top Layer "NONET_L-01_P-001" (solid, shelved, pour order 42): 11.975,6.687 11.975,0.112 297.6,0.112 297.6,9.813 278.225,9.813 277.875,10.163 277.875,12.988 275.038,15.825 223.412,15.825 217.4,9.813 198.188,9.813 183.15,24.85 145.65,24.85 130.963,10.163 105.3,10.163 104.775,10.688 94.888,20.575 43.1,20.575 33.725,11.2 31.85,9.325 14.612,9.325
GND on Top Layer "NONET_L-01_P-001" (solid, shelved, pour order 27): 12.125,293.425 12.125,300 296.1,300 296.1,290.3 282.075,290.3 276.7,284.925 220.475,284.925 215.1,290.3 188.95,290.3 173.7,275.05 140.475,275.05 125.225,290.3 105.8,290.3 104.925,289.425 104.925,287.325 96.4,278.8 43.05,278.8 31.55,290.3 15.25,290.3
no net on Top Layer "NONET_L-01_P-001" (solid, shelved, pour order 31): -141.951,51.889 -138.25,48.187 -126.775,48.187 -123.115,51.847 -121.81,51.847 -114.8,44.838 -103.65,44.838 -103.65,34.68 -124.742,34.68 -246.075,34.68 -246.075,103.238 -211.725,103.238 -197.175,117.788 -197.175,159.413 -172.225,159.413 -172.225,85.988 -195.75,62.463 -195.75,49.588 -194.3,48.137 -146.625,48.137 -142.872,51.891
no net on Top Layer "NONET_L-01_P-001" (solid, shelved, pour order 10): -126.366,316.9 -125.281,316.9 -123.606,318.575 -123.606,322.7 -119.056,327.25 -119.056,330.9 -122.231,334.075 -237.906,334.075 -237.906,209.075 -165.156,209.075 -165.156,275.8 -203.881,314.525 -203.881,318.85 -202.431,320.3 -154.281,320.3 -150.856,316.875 -145.456,316.875 -141.981,320.35 -133.981,320.35 -130.609,316.978
GND on Top Layer "NONET_L-01_P-001" (solid, shelved, pour order 44): 170.125,256.2 170.1,256.175 171.6,254.675 171.6,201.5 197.925,175.175 197.925,124.35 181.1,107.525 181.1,31.825 190.65,22.275 309.575,22.275 309.575,0 400.654,0 420,19.346 420,66.083 399.692,66.083 372.275,93.5 372.275,125.125 369.95,127.45 369.95,140.225 387.25,157.525 420,157.525 420,277.625 397.622,300.003 309.575,300 309.575,277.625 187.575,277.625 170.125,260.175
no net on Top Layer "NONET_L-01_P-001" (solid, shelved, pour order 36): 160.7,41.853 160.7,64.975 144.373,81.302 111.174,81.302 86.302,81.302 55.724,50.724 55.724,41.852 57.72,39.856 58.653,39.856 60.724,41.927 62.524,43.727 73.849,43.727 77.72,39.856 78.678,39.856 82.549,43.727 133.849,43.727 135.724,41.852 137.72,39.856 138.678,39.856 143.574,44.752 152.824,44.752 157.72,39.856 158.703,39.856
no net on Top Layer "NONET_L-01_P-001" (solid, shelved, pour order 34): 27.575,110.845 18.505,110.845 15.925,113.425 0,113.425 0,124.725 9.95,124.725 24.8,124.725 27.575,121.95
GND on Top Layer "NONET_L-01_P-001" (solid, shelved, pour order 32): 46.15,118.798 46.15,109.2 33.2,96.25 0,96.25 0,109.855 28.68,109.855 29.825,111 29.825,125.575 39.373,125.575
GND on Top Layer "NONET_L-01_P-001" (solid, shelved, pour order 29): 407.645,75.875 407.645,76.245 409.95,78.55 409.95,94.375 406.625,97.7 396.425,97.7 396.425,110.586 420,110.586 420,74.225 418.075,72.3 408.7,72.3 407.645,73.355
no net on Top Layer "NONET_L-01_P-001" (solid, shelved, pour order 0): 420,142.7 382.998,142.7 382.998,118.677 387.5,114.175 420,114.175
GND on Top Layer "NONET_L-01_P-001" (solid, shelved, pour order 24): 378.15,110.625 378.15,97.7 397.325,97.7 397.325,110.625
no net on Top Layer "NONET_L-01_P-001" (solid, shelved, pour order 21): 7,148.025 7,139.95 35.6,139.95 35.6,148.025
no net on Top Layer "NONET_L-01_P-001" (solid, shelved, pour order 6): 56.075,258.675 56.075,238.925 76.35,218.65 105.025,218.65 144.1,218.65 160.475,235.025 160.475,258.1 158.479,260.096 157.546,260.096 155.475,258.025 153.675,256.225 142.35,256.225 138.479,260.096 137.521,260.096 133.65,256.225 82.35,256.225 80.475,258.1 78.479,260.096 77.521,260.096 72.625,255.2 63.375,255.2 58.479,260.096 57.496,260.096
no net on Top Overlay "NONET_L-01_P-001" (solid, shelved): 384.175,75.8 373.15,86.825 357.975,71.65 336.225,71.65 334.175,69.6 334.175,42.925 325.95,34.7 182.7,34.7 182.7,32.5 189.925,25.275 359.95,25.275 384.175,49.5
no net on Top Overlay "NONET_L-01_P-001" (solid, shelved): 383.247,184.628 372.65,195.225 372.65,217.275 325.25,264.675 177.15,264.675 187.05,274.575 375.825,274.575 415,235.4 415,184.628
no net on Bottom Solder "NONET_L-01_P-001" (solid, shelved): 419.453,184.148 382.451,184.148 382.451,157.575 419.453,157.575
no net on Bottom Solder "NONET_L-01_P-001" (solid, shelved, pour order 1): 420,142.625 382.998,142.625 382.998,118.502 387.375,114.125 420,114.125
no net on Bottom Solder "NONET_L-01_P-001" (solid, shelved, pour order 3): 268.895,134.095 271.925,137.125 307.35,137.125 311.55,132.925 314.65,132.925 318.85,137.125 343.775,137.125 347.975,132.925 351.175,132.925 355.375,137.125 381.875,137.125 381.875,118.925 375.825,112.875 375.825,93.575 313,93.575 289.425,117.15 272.025,117.15 268.895,120.28
no net on Bottom Solder "NONET_L-01_P-001" (solid, shelved, pour order 2): 268.875,177.55 268.875,166.65 271.95,163.575 307.675,163.575 311.15,167.05 315.75,167.05 319.225,163.575 344.05,163.575 347.525,167.05 351.75,167.05 353.15,165.65 353.15,127.475 381.725,127.475 381.725,190.95 365.55,207.125 313.175,207.125 288.475,182.425 272.1,182.425 268.906,179.231
no net on Bottom Solder "NONET_L-01_P-001" (solid, shelved, pour order 23): 271.85,130.413 271.85,168.55 354.55,168.55 354.55,130.615
no net on Bottom Solder "NONET_L-01_P-001" (solid, shelved, pour order 5): 205.35,221.55 176.4,250.5 176.4,259.25 177.363,260.212 178.663,260.212 181.938,256.937 194.088,256.937 197.362,260.212 198.688,260.212 201.963,256.937 214.088,256.937 217.363,260.212 218.688,260.212 221.963,256.937 234.088,256.937 237.363,260.212 238.662,260.212 253.225,245.65 253.225,232.975 258.986,227.214 258.986,224.011 256.526,221.55
no net on Bottom Solder "NONET_L-01_P-001" (solid, shelved, pour order 37): 273.075,78.425 271.075,78.425 256,63.35 256,41.425 257.55,39.875 258.85,39.875 262.125,43.15 274.275,43.15 277.55,39.875 278.875,39.875 282.15,43.15 294.275,43.15 297.55,39.875 298.875,39.875 302.15,43.15 314.275,43.15 317.55,39.875 318.85,39.875 326.625,47.65 326.625,70.85 319.05,78.425
no net on Bottom Solder "NONET_L-01_P-001" (solid, shelved, pour order 38): 205.563,78.488 176.613,49.537 176.613,40.788 177.575,39.825 178.875,39.825 182.15,43.1 194.3,43.1 197.575,39.825 198.9,39.825 202.175,43.1 214.3,43.1 217.575,39.825 218.9,39.825 222.175,43.1 234.3,43.1 237.575,39.825 238.875,39.825 253.438,54.388 253.437,67.063 259.199,72.824 259.199,76.027 256.738,78.488
no net on Bottom Solder "NONET_L-01_P-001" (solid, shelved, pour order 4): 272.875,221.55 268.775,221.55 255.8,234.525 255.8,258.55 257.35,260.1 258.65,260.1 261.925,256.825 274.075,256.825 277.35,260.1 278.675,260.1 281.95,256.825 294.075,256.825 297.35,260.1 298.675,260.1 301.95,256.825 314.075,256.825 317.35,260.1 318.65,260.1 326.425,252.325 326.425,229.125 318.85,221.55
no net on Top Solder "NONET_L-01_P-001" (solid, shelved): 383.439,181.211 370.725,193.925 370.725,216.75 324.575,262.9 172.975,262.9 186.35,276.275 377.375,276.275 417.6,236.05 417.6,181.25
no net on Top Solder "NONET_L-01_P-001" (solid, shelved): 386.575,76.575 373.275,89.875 357.2,73.8 335.6,73.8 332.25,70.45 332.25,43.725 325.1,36.575 181.1,36.575 181.1,31.975 189.875,23.2 361.375,23.2 386.575,48.4
no net on Bottom Overlay "NONET_L-01_P-001" (solid, shelved): 273.5,171.925 273.5,127.8 287.925,127.8 311.85,103.875 363.3,103.875 375.45,116.025 375.45,123.888 370.975,128.363 370.975,132 376.477,137.502 376.477,170.073 350.925,195.625 311.175,195.625 287.475,171.925
no net on Bottom Overlay "NONET_L-01_P-001" (solid, shelved): 198.175,230.625 177.6,251.2 177.6,255.525 240.725,255.525 251.5,244.75 251.5,236.081 251.5,230.625
no net on Bottom Overlay "NONET_L-01_P-001" (solid, shelved): 294.725,223.65 288,230.375 263.173,230.375 258.025,235.523 258.025,255.225 299.925,255.225 299.925,231.304 315.625,231.304 315.625,255.225 320.55,255.225 323.525,252.25 323.525,229.3 317.875,223.65
no net on Bottom Overlay "NONET_L-01_P-001" (solid, shelved, pour order 45): 295.875,76.325 289.15,69.6 264.323,69.6 259.175,64.452 259.175,44.75 301.075,44.75 301.075,68.671 316.775,68.671 316.775,44.75 321.7,44.75 324.675,47.725 324.675,70.675 319.025,76.325
no net on Bottom Overlay "NONET_L-01_P-001" (solid, shelved, pour order 58): 199.325,69.35 178.75,48.775 178.75,44.45 241.875,44.45 252.65,55.225 252.65,63.894 252.65,69.35